# EAGLE board Wedding_Centerpiece_Controller_V1.3 (EAGLE 6.4)
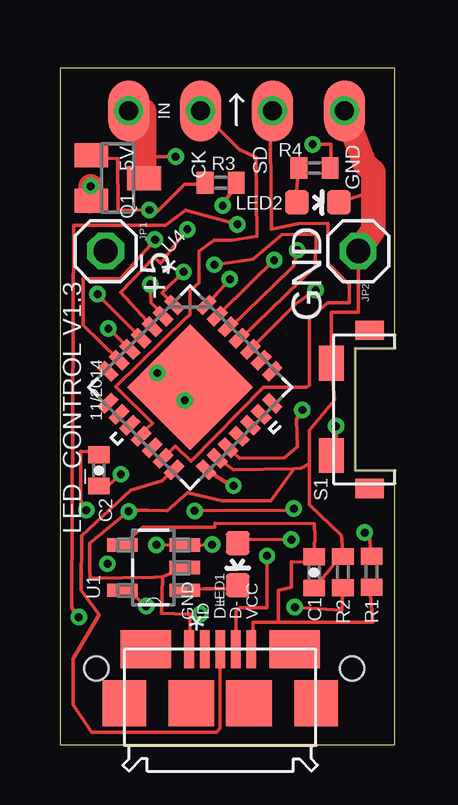
[diagram p0: board, top side]
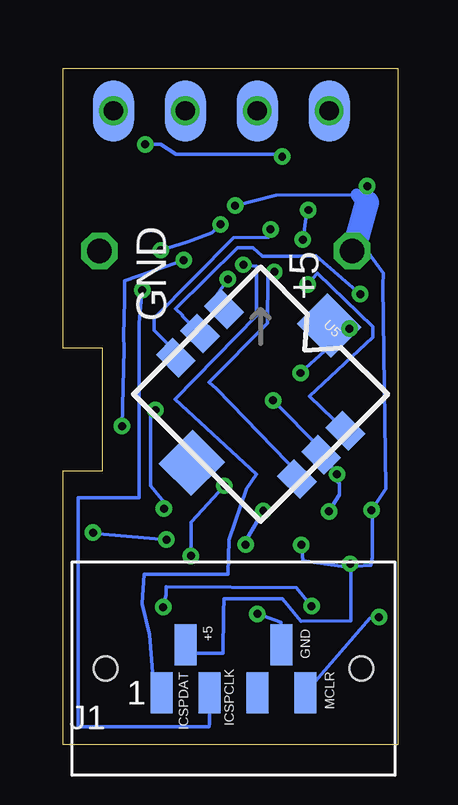
[diagram p1: board, bottom side, seen from below]

Size 13.97 x 28.19 mm. Coordinates in mm from the lower left corner, seen from the top.
Outline: 0,0 13.97,0 13.97,11.43 12.32,11.43 12.32,16.53 13.97,16.53 13.97,28.19 0,28.19 0,0
Copper layers (1*16): Top 0.0356mm / dielectric 1.5011mm / Bottom 0.0356mm
Design rules "OSH_Park_PCBOrder": minimum track width 6mil, minimum drill 13mil, track to track 6mil, track to pad 6mil, pad to pad 6mil, via to via 6mil, smd to smd 6mil, copper to edge 15mil, drill to drill 6mil, minimum pad ring 7mil, minimum via ring 7mil, stop-mask expansion 3mil, vias tented up to drill 13mil, thermal gap 10mil

## Footprints (pad centres in the part's own frame; a part is rotated, then mirrored left to right if it is on the bottom)
0402-CAP = smd 0.7 x 0.9: 1 -0.65,0; 2 0.65,0
AVX_9188_6-WAY_MATING_GUIDE = smd 0.9 x 1.7: 1 -3,-1; 2 -2,1; 3 -1,-1; 4 1,-1; 5 3,-1; 6 2,1 | hole 1: -5.334,0; 5.334,0
1X01 = drill 1.016 octagon: 1 0,0
LED-0603 = smd 1 x 1: A 0,-0.877; C 0,0.877
JEREMIAH_SOT23 = smd 1 x 1.4: 1 -0.95,-1.1; 2 0.95,-1.1; 3 0,1.1
R0402 = smd 0.7 x 0.9: 1 -0.65,0; 2 0.65,0
JEREMIAH_EVQP4_SWITCH = smd 1.45 x 1.05: 1 -1.925,2.65; 2 1.925,2.65 | smd 0.8 x 1.2: NC_1 -3.3,1.05; NC_2 3.3,1.05
SOT95P280X145-5N = smd 1.27 x 0.559: 1 -1.295,0.94; 2 -1.295,0; 3 -1.295,-0.94; 4 1.295,-0.94; 5 1.295,0.94
JEREMIAH_USB_MICRO_ZX62R-B-5P = smd 0.4 x 1.6: D+_3 0,0; D-_2 0.65,0; GND_5 -1.3,0; ID_4 -0.65,0; VCC_1 1.3,0 | smd 2.1 x 1.6: P$6 -3.1,0; P$7 3.1,0 | smd 1.9 x 1.9: P$8 -1.2,-2.25; P$9 1.2,-2.25 | smd 1.8 x 1.9: P$10 -4,-2.25; P$11 4,-2.25
JEREMIAH_LED_STRIP_WS2801_CLENLED_2L_BEGIN = smd 2.54 x 1.7: CLK 0,1.5; DATA 0,-1.5; GND 0,-4.5; VCC 0,4.5 | smd 2.54 x 1.7 bottom: CLK1 0,1.5; DATA1 0,-1.5; GND1 0,-4.5; VCC1 0,4.5 | drill 0.8: CLK2 0,1.5; DATA2 0,-1.5; GND2 0,-4.5; VCC2 0,4.5
QFN65P600X600X100-29N = smd 0.813 x 0.406: 1 -2.896,1.956; 21 2.896,1.956 | smd 0.813 x 0.432: 2 -2.896,1.295; 3 -2.896,0.66; 4 -2.896,0; 5 -2.896,-0.66; 6 -2.896,-1.295; 7 -2.896,-1.956; 15 2.896,-1.956; 16 2.896,-1.295; 17 2.896,-0.66; 18 2.896,0; 19 2.896,0.66; 20 2.896,1.295 | smd 0.432 x 0.813: 8 -1.956,-2.896; 9 -1.295,-2.896; 10 -0.66,-2.896; 11 0,-2.896; 12 0.66,-2.896; 13 1.295,-2.896; 14 1.956,-2.896; 23 1.295,2.896; 24 0.66,2.896; 25 0,2.896; 26 -0.66,2.896; 27 -1.295,2.896 | smd 0.406 x 0.813: 22 1.956,2.896; 28 -1.956,2.896 | smd 3.708 x 3.708: 29 0,0
ALPS_SKRHAAE010 = smd 1.35 x 1: A -3.575,1.425; B 3.575,1.425; C -3.575,-1.425; CTR -3.575,0; D 3.575,-1.425; GND 3.575,0 | smd 2 x 1.8: NC 0,4.05 | smd 1.9 x 2: NC@0 0,-4.05

## Placement (x,y rotation side)
C1  4.7u  [0402-CAP]  10.6,7.18 90 top
C2  4.7u  [0402-CAP]  1.63,11.44 90 top
J1  ISPTOUCH_HEADER  [AVX_9188_6-WAY_MATING_GUIDE]  6.86,3.17 0 bottom
JP1  VCC  [1X01]  1.91,20.57 0 top
JP2  GND  [1X01]  12.45,20.57 0 top
LED1  RED  [LED-0603]  7.41,7.53 180 top
LED2  GREEN  [LED-0603]  10.76,22.61 270 top
Q1  PCHANNELSOT23 Si2301CDS-T1-E3  [JEREMIAH_SOT23]  2.41,23.61 270 top
R1  4.7k  [R0402]  12.99,7.21 270 top
R2  2K  [R0402]  11.8,7.2 270 top
R3  4.7k  [R0402]  6.71,23.42 0 top
R4  4.7k  [R0402]  10.62,24.03 0 top
S1  JEREMIAH_SWITCH-MOMENTARY-2EVQP4  [JEREMIAH_EVQP4_SWITCH]  13.97,13.98 90 top
U1  MCP73832T-2ACI/OT  [SOT95P280X145-5N]  3.9,7.38 180 top
U2  JEREMIAH_USB_MICROB_PLUGZX62R-B-5P  [JEREMIAH_USB_MICRO_ZX62R-B-5P]  6.69,3.98 0 top
U3  JEREMIAH_LED_STRIP_WS2801CLENLED_2L_BEGIN  [JEREMIAH_LED_STRIP_WS2801_CLENLED_2L_BEGIN]  7.37,26.42 90 top
U4  PIC16F1788-I/ML  [QFN65P600X600X100-29N]  5.43,14.9 315 top
U5  JOYSTICK_5_WAYSKRHAAE010  [ALPS_SKRHAAE010]  5.73,14.61 315 bottom

## Library data of the parts
C1 C2 = SparkFun-Passives
J1 = daspilker
JP1 JP2 = pinhead
LED1 LED2 = SparkFun-LED
Q1 S1 U2 U3 = Phoenix_Hoop_94_PolyPro_AlwaysOn
R1-R4 = resistor
U1 = Microchip_By_element14_Batch_1; MPN: MCP73832T-2ACI/OT; OC_FARNELL: 1332159; OC_NEWARK: 88K5656; PACKAGE: SOT-5; SUPPLIER: Microchip
U4 = Microchip
U5 = Switches

## Nets
5V: C1.2 R1.2 U1.4 U2.VCC_1
GND: C1.1 C2.1 J1.6 JP2.1 LED2.C R2.1 S1.2 U1.2 U2.GND_5 U3.GND2 U4.5 U4.16 U5.GND
ICSPCLK: J1.3 U4.24
ICSPDAT: J1.1 U4.25
LED_ON: Q1.1 R3.1 U4.6
MCLR: J1.5 U4.26
N$1: R2.2 U1.5
N$2: LED1.A R1.1
N$3: LED1.C U1.1
N$5: Q1.3 R4.2 U3.VCC2
N$6: LED2.A R4.1
RA0: S1.1 U4.27
RA1: U4.28 U5.A
RA2: U4.1 U5.D
RA3: U4.2 U5.B
RA4: U4.3 U5.C
RA5: U4.4 U5.CTR
RA6: U4.7
RS232_RX: U2.D-_2 U4.15
RS232_TX: U2.D+_3 U4.14
SDO: U4.23
SPI_DO: U3.DATA2 U4.13
SPI_SCK: U3.CLK2 U4.11
V_BATT: C2.2 J1.2 JP1.1 Q1.2 R3.2 U1.3 U4.17

## Tracks (layer width: path | path; a pad name or v marks a point on that pad's centre or on a via)
5V
  Top 0.152: 9.12,5.11 8.05,5.11 8.05,4.06 U2.VCC_1 | 9.12,5.11 13.05,5.11 12.93,6.48 R1.2 | 9.12,5.11 9.11,6.44 9.65,6.57 9.65,7.62 10.54,7.61 C1.2 10.63,8.64 10.62,9.22 6.46,9.22 6.45,9.07 4.83,9.07 4.47,9.07 3.45,9.07 U1.4
GND  (via drill 0.33)
  Top 0.152: 10.41,13.12 11.45,14.37 S1.2 11.33,18.02 12.45,18.03 JP2.1 12.45,20.7 | 10.41,13.12 10.4,11.7 10.05,11.52 9.77,11.51 | 9.77,11.51 7.23,11.46 U4.16 | 4.28,7.01 5.44,7.49 U1.2 | 4.28,7.01 4.23,5.49 5.33,5.43 v5.87,5.46 5.87,5.42 5.44,5.38 5.41,4.06 U2.GND_5 | 4.28,7.01 3.95,6.98 1.26,6.95 1.25,7.4 1.25,8.4 v2.87,9.73 2.95,9.73 3,9.78 3.68,9.78 4.47,9.75 5.31,10.5 6.75,10.17 8.81,10.17 9.77,11.51 | C1.1 11.22,7.25 11.54,7.68 11.9,7.74 11.76,7.78 R2.1 11.76,8.6 11.74,8.73 10.4,10.01 10.41,13.12 | LED2.C 13.02,23.04 12.61,24.18 12.61,24.46 | 5.17,14.35 v5.21,14.35 v4.06,15.49 | U4.5 2.29,17.11 v2.02,17.34 | C2.1 2.02,10.79 v2.54,11.27
  Top 1.016: JP2.1 13.08,21.46 13.08,23.88 12.71,24.18 12.61,24.46 U3.GND2
  Bottom 0.152: v2.54,11.27 3.1,12.04 3.16,12.04 U5.GND 3.2,12.35 v5.21,14.35 | v2.54,11.27 2.44,10.88 | v5.87,5.46 4.88,5.11 4.88,3.81 J1.6 | v2.02,17.34 v4.06,15.49 | v2.54,11.27 2.64,11.09 2.44,10.88 | 2.44,10.88 2.44,10.42 v2.87,9.73
ICSPCLK  (via drill 0.33)
  Top 0.152: v10.67,18.95 9.84,18.37 U4.24
  Bottom 0.152: J1.3 7.86,0.87 7.87,0.76 13.34,0.76 13.34,10.29 10.79,10.29 10.79,17.56 v10.67,18.95
ICSPDAT  (via drill 0.33)
  Top 0.152: U4.25 7.55,16.95 10.67,19.93 10.68,21.19 10.67,21.25 10.22,21.27 9.27,21.25 8.05,20.23 v6.45,20
  Bottom 0.152: v6.45,20 5.91,19.93 5.9,17.89 9.29,14.39 5.89,11.27 6.31,10.68 7.05,8.55 7.08,7.1 10.58,7.1 10.66,5.89 10.37,4.59 10.18,2.23 J1.1
LED_ON  (via drill 0.33)
  Top 0.152: U4.6 0.96,17.47 0.96,19.43 2.54,19.43 v3.97,21.05 | Q1.1 1.3,24.47 2.4,24.42 2.43,22.28 v3.73,22.29 4.06,22.22 5.21,23.37 6,23.37 R3.1
  Bottom 0.152: v3.73,22.29 3.83,22.09 v3.97,21.05
MCLR  (via drill 0.33)
  Top 0.152: U4.26 7.13,17.41 9.61,19.81 9.73,19.94 v9.9,20.61 | v0.79,5.32 0.72,5.35 0.5,5.74 0.58,21.66 4.41,21.64 5.24,22.27 v7.4,21.69
  Bottom 0.152: v7.4,21.69 7.75,21.34 8.76,20.95 v9.9,20.61 | J1.5 1.16,5.28 v0.79,5.32
N$1  (via drill 0.33)
  Top 0.152: v9.79,5.74 11.76,5.6 11.79,6.34 R2.2 11.75,6.46 | v3.6,5.78 3.12,6.2 3,6.43 U1.5
  Bottom 0.152: v3.6,5.78 4.23,6.55 9.67,6.59 9.67,6.26 v9.79,5.74
N$2  (via drill 0.33)
  Top 0.152: v12.71,8.84 12.91,8.71 R1.1 | v9.65,8.55 7.92,8.56 7.42,8.53 LED1.A
  Bottom 0.152: v12.71,8.84 12.75,8.81 v9.65,8.55
N$3
  Top 0.152: LED1.C 7.39,6.5 5.97,6.5 5.46,6.45 U1.1
N$5  (via drill 0.33)
  Top 0.152: R4.2 11.3,24.04 11.3,25.02 v10.54,25.02 | Q1.3 3.51,24.51 v4.83,24.51
  Top 1.016: Q1.3 3.51,26.42 U3.VCC2
  Bottom 0.152: v10.54,25.02 9.91,25.02 9.26,24.6 4.83,24.6 v4.83,24.51
N$6
  Top 0.152: LED2.A 9.81,22.68 R4.1
RA0  (via drill 0.33)
  Top 0.152: S1.1 11.57,13.06 v11.51,13.28 | v8.94,20.19 8,19.3 U4.27
  Bottom 0.152: v11.51,13.28 11.43,16.51 11.43,17.04 11.41,18.52 11.4,19.34 9.23,20.08 v8.94,20.19
RA1  (via drill 0.33)
  Top 0.152: v7.09,19.41 6.41,18.66 U4.28
  Bottom 0.152: v7.09,19.41 7.76,18.47 7.4,18.12 | 7.29,18.01 7.4,18.12 | U5.A 7.25,18.12 7.4,18.12
RA2  (via drill 0.33)
  Top 0.152: v5.16,19.71 4.27,18.85 U4.1
  Bottom 0.152: v5.16,19.71 5.21,19.68 5.42,19.5 5.43,17.57 7.87,15.11 7.57,14.83 4.01,11.15 4.13,11.15 U5.D
RA3  (via drill 0.33)
  Top 0.152: v3.77,19.19 3.81,18.41 4.3,17.93 U4.2
  Bottom 0.152: U5.B 3.68,14.52 1.05,16.99 1.05,17.42 3.35,19.65 v3.77,19.19
RA4  (via drill 0.33)
  Top 0.152: U4.3 2.54,18.85 3.94,20.32 4.19,20.07 v5.31,21.48
  Bottom 0.152: v5.31,21.48 5.4,21.14 6.86,21.13 10.16,17.78 10.16,17.27 9.27,16.38 | 9.27,16.38 9.09,16.2 | U5.C 9.27,16.38
RA5  (via drill 0.33)
  Top 0.152: v1.57,18.78 1.79,18.54 U4.4
  Bottom 0.152: v1.57,18.78 3.41,20.38 4.13,20.36 5.65,20.36 6.04,20.71 6.69,20.72 9.27,18.16 8.97,17.91 8.97,17.86 U5.CTR
RS232_RX  (via drill 0.33)
  Top 0.152: U2.D-_2 7.34,5.56 7.49,5.71 8.64,5.71 v8.64,7.87 | v7.24,10.79 7.15,10.79 U4.15
  Bottom 0.152: v8.64,7.87 8.64,9.27 v7.24,10.79
RS232_TX
  Top 0.152: U4.14 4.75,11.46 4.6,11.33 4.27,11 2.95,10.62 0.9,8.7 0.88,6.44 1.63,5.42 0.56,3.58 0.56,1.68 1.32,0.53 6.53,0.53 6.68,0.69 6.68,3.96 U2.D+_3
SPI_DO
  Top 0.152: U4.13 4.81,12.45 4.83,12.45 5.46,11.81 8.5,14.9 10.29,14.9 10.41,14.99 10.41,17.78 11.18,18.41 12.06,18.41 12.06,19.18 11.18,20.07 11.18,21.74 9.93,21.72 8.81,21.49 8.79,25.11 8.87,25.65 | 9.02,26.16 8.99,26.52 8.87,25.65 | 8.87,25.65 U3.DATA2
SPI_SCK
  Top 0.152: U4.11 3.6,13.14 3.85,13.4 2.33,14.93 5.23,17.78 5.42,17.93 5.43,18.25 5.42,18.91 5.8,19.26 5.8,20.56 6.42,21.04 6.88,21.03 7.19,21.03 7.96,21.14 8.21,21.2 8.19,24.47 7.52,24.8 7.48,24.8 U3.CLK2
V_BATT  (via drill 0.33)
  Top 0.152: v4.03,8.33 5.02,8.32 U1.3 5.91,8.32 v6.35,8.35 | v5.62,9.75 9.62,9.77 9.8,9.89 v9.75,9.84 | v10.11,13.95 9.87,13.55 9.9,12.42 9.36,11.95 7.49,11.94 U4.17 | Q1.2 1.25,22.65 | v6.79,22.46 7.37,23.41 R3.2 | C2.2 1.62,12.19 0.87,12.22 0.87,10.19 v1.1,9.78
  Top 1.016: 1.25,22.65 v1.28,23.28
  Bottom 0.152: v1.1,9.78 1.13,9.74 0.51,10.67 0.62,19.15 0.61,19.66 1.27,20.57 JP1.1 | v1.1,9.78 1.08,9.81 | 1.08,9.81 1.06,9.4 1.07,7.81 1.12,7.48 1.76,7.43 v1.99,7.55 2.08,7.4 | 2.08,7.4 3.97,7.67 v4.03,8.33 | J1.2 8.84,3.81 7.29,3.81 7.28,5.49 7.24,6.08 4.81,6.08 4.04,5.15 1.96,5.17 1.97,7.38 2.08,7.4 | v6.35,8.35 6.3,8.59 v5.62,9.75 | v9.75,9.84 9.66,9.98 10.32,10.8 10.31,11.88 10.32,13.91 v10.11,13.95 | 1.67,21.23 1.36,22.54 1.47,22.55 | 1.73,22.93 5.08,22.9 v6.79,22.46 | v1.1,9.78 1.14,9.85 1.12,9.85 1.1,9.8 1.08,9.81
  Bottom 0.406: JP1.1 1.92,20.62
  Bottom 0.508: v1.28,23.28 1.36,22.54 | 1.47,22.55 1.73,22.93
  Bottom 1.016: 1.92,20.62 1.67,21.23 1.3,22.59

## Text on the board
tNames: LED_CONTROL V1.3 | +5 | GND | 11/2014
bNames: +5 | GND | GND | +5 | MCLR | ICSPCLK | ICSPDAT